# Altium PCB BLE_ADS_ver02.PcbDoc (part 2 of 2)
Units mm, origin at the board's own origin, x right, y up, seen from the top; angles counter-clockwise.
Board outline 74.47 x 53.97 mm, 4 copper layers (Top Layer, GND, PWR, Bottom Layer), stack 0.778 mm thick; 104 components, 72 nets, 369 pads, 122 vias.
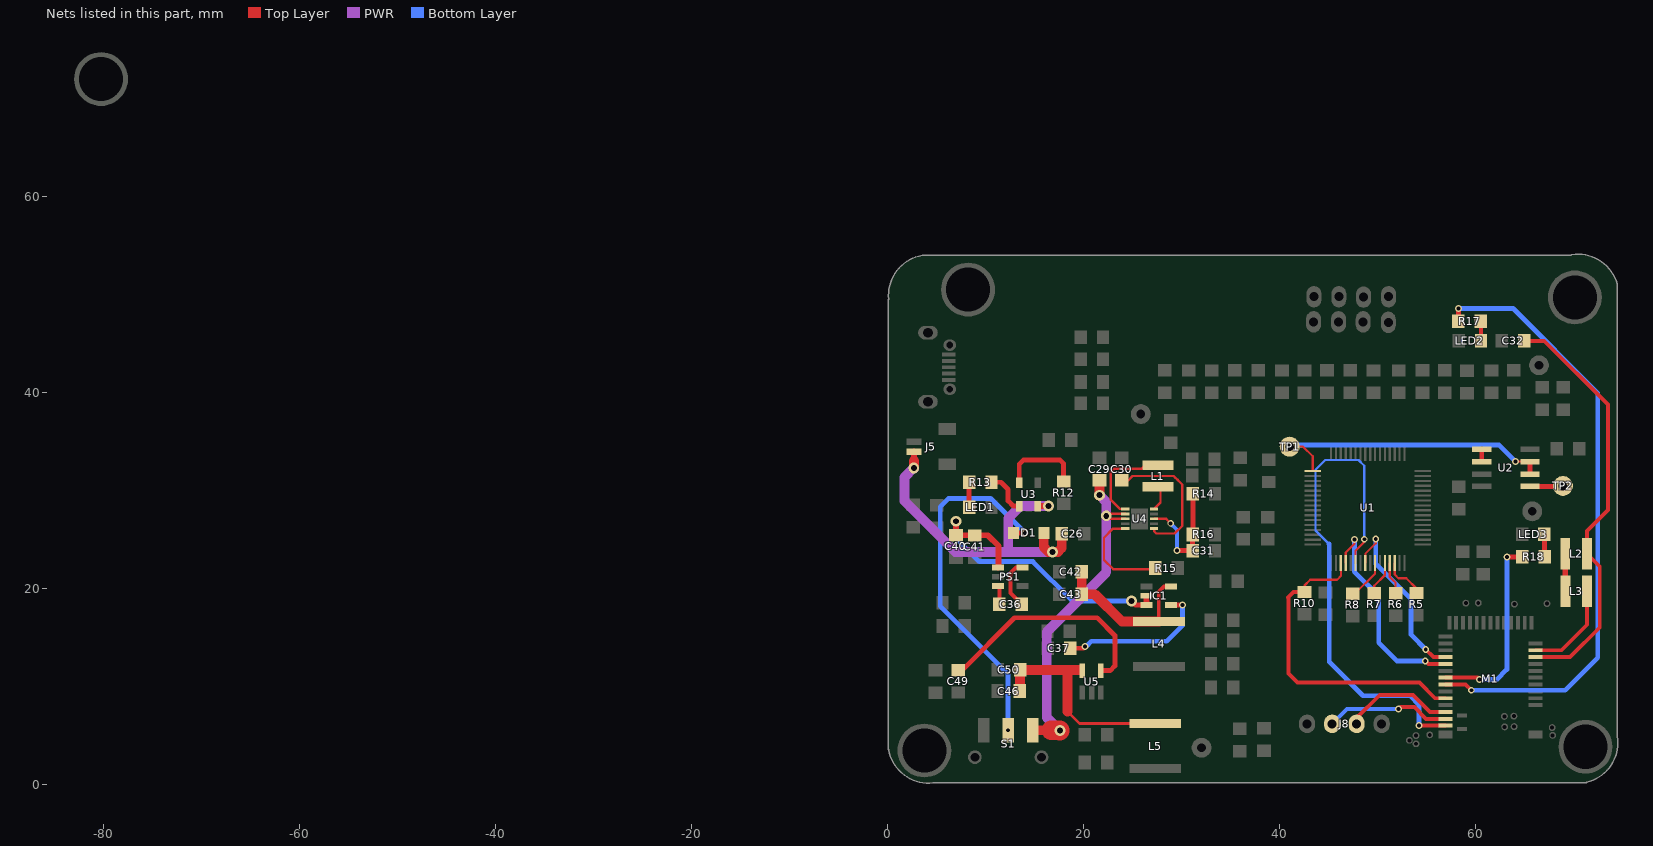
[diagram p4: the nets of this part, all layers, seen from the top]

## Via types
v1: diameter 1.1, hole 0.6, Top Layer to Bottom Layer, 97 vias
v2: diameter 0.7, hole 0.4, Top Layer to Bottom Layer, 25 vias

## Nets (pads, with @x,y where several pads share a name; then routed paths per layer and width w, separated by ;. In a path a pad name is that pad's centre, name@x,y a point inside that pad or via, vN(x,y) a via of type N, cw(c..) or ccw(c..) an arc to the next point about the centre after c; other vN are vias at no path point) (continued)
NetC26_2: C26.2 D1.2 J5.1 U3.3 | length 36.7
  Top Layer w0.6: 2.718,33.045 J5.1@2.718,33.985 ; U3.3@15.377,28.416 16.605,28.416 v1@16.599,28.423 ; v1(16.459,28.423) v1@16.599,28.423 ; v1@16.612,28.423 v1@16.599,28.423
  Top Layer w1: v1(2.718,32.309) 2.718,33.045 ; D1.2@15.977,25.679 15.977,24.231 16.459,23.749 v1(16.866,23.749) 17.424,23.749 17.805,24.13 C26.2@17.805,25.603
  PWR w1: v1(2.718,32.309) 2.692,32.309 1.753,31.369 1.753,28.956 6.96,23.749 v1(16.866,23.749) ; 12.344,24.257 12.344,27.153 13.618,28.426 16.455,28.426 v1(16.459,28.423)
NetC30_2: C30.2 U4.6 | length 14.4
  Top Layer w0.25: C30.2@23.927,31.064 24.613,31.064 25.044,31.496 29.231,31.496 29.406,31.321 29.411,31.321 29.66,31.072 29.66,31.067 30.109,30.618 30.109,30.57 30.106,30.567 30.106,26.402 29.333,25.629 27.457,25.629 27.231,25.855 U4.6@27.231,26.062
NetC31_2: C31.2 R14.1 R16.2 U4.8 | length 12.4
  Top Layer w0.25: U4.8@27.231,27.127 28.473,27.127 v2(28.931,26.67)
  Top Layer w0.5: v2(29.591,23.901) 29.616,23.876 C31.2@31.166,23.876 R16.2@31.166,25.527 31.224,25.585 31.224,29.635 R14.1@31.166,29.693
  Bottom Layer w0.4: v2(28.931,26.67) 29.591,26.01 v2(29.591,23.901)
NetC32_2: C32.2 L2.2 M1.9 | length 43.2
  Top Layer w0.4: C32.2@65.024,45.288 67.056,45.288 73.558,38.786 73.558,28.042 71.407,25.89 L2.2@71.407,23.546 71.425,23.546 72.72,22.25 72.72,16.027 69.707,13.014 M1.9@66.17,13.014
NetC36_1: C36.1 PS1.5 | length 5.1
  Top Layer w0.4: C36.1@13.741,18.415 12.598,19.558 12.598,21.615 13.142,22.159 PS1.5@13.798,22.159
NetC36_2: C36.2 PS1.3 | length 1.9
  Top Layer w0.4: PS1.3@11.298,20.259 11.455,20.101 C36.2@11.455,18.415
NetC37_1: C37.1 IC1.4 | length 15.7
  Top Layer w0.5: C37.1@18.669,13.919 20.015,13.919 v2(20.193,14.097) ; IC1.4@28.961,18.329 30.114,18.329 v2(30.124,18.339)
  Bottom Layer w0.5: v2(20.193,14.097) 20.301,14.097 20.834,14.63 28.524,14.63 30.124,16.231 v2(30.124,18.339)
NetC40_2: C40.2 C41.2 IC1.2 IC1.3 PS1.1 | length 33.6
  Top Layer w0.5: v1@24.714,18.745 v1(24.917,18.745) 25.334,18.329 IC1.3@26.461,18.329
  Top Layer w0.6: v1(7.01,26.873) C40.2@7.01,25.451 10.262,25.451 11.348,24.364 11.348,22.21 PS1.1@11.298,22.159 ; IC1.3@26.461,18.329 IC1.2@26.461,19.279
  Bottom Layer w0.5: v1(7.01,26.873) 7.01,25.146 9.398,22.758 14.859,22.758 18.872,18.745 v1(24.917,18.745)
NetC42_2: C42.2 C43.2 IC1.5 L4.1 | length 15.8
  Top Layer w0.4: L4.1@27.737,16.651 27.716,16.671 27.716,19.71 28.235,20.229 IC1.5@28.961,20.229
  Top Layer w1: C42.2@19.863,21.717 C43.2@19.863,19.431 21.184,19.431 23.964,16.651 L4.1@27.737,16.651
NetC46_2: C46.2 C50.2 L5.1 U5.5 | length 22
  Top Layer w0.3: 18.39,7.468 19.62,6.237 L5.1@27.356,6.237
  Top Layer w1: C46.2@13.538,9.55 13.538,11.709 18.567,11.709 ; 18.39,7.468 18.39,11.532 18.567,11.709 ; 19.609,11.709 18.567,11.709
NetC49_2: C49.2 U5.4 | length 23.7
  Top Layer w0.5: C49.2@7.264,11.684 7.645,11.684 12.991,17.029 21.426,17.029 23.241,15.215 23.241,12.116 22.758,11.633 U5.4@21.803,11.633
NetD1_1: D1.1 S1.2 | length 37.4
  Top Layer w0.5: D1.1@12.877,25.679 v2(14.072,25.679) v2@14.122,25.629
  Bottom Layer w0.5: v2(12.344,5.547) 12.344,11.278 5.41,18.212 5.41,28.346 6.274,29.21 10.541,29.21 v2(14.072,25.679)
NetL1_1: L1.1 U4.1 | length 10.3
  Top Layer w0.25: U4.1@24.281,28.127 23.765,28.127 22.803,29.089 22.803,31.875 23.186,32.258 25.984,32.258 26.568,32.842 27.668,32.842 L1.1@27.915,32.596
NetL1_2: L1.2 U4.10 | length 2.6
  Top Layer w0.25: U4.10@27.231,28.127 27.889,28.786 27.889,30.371 L1.2@27.915,30.396
NetL2_1: L2.1 L3.2 | length 3.8
  Top Layer w0.6: L3.2@69.207,19.761 L2.1@69.207,23.546
NetL3_1: L3.1 M1.10 | length 9.8
  Top Layer w0.4: M1.10@66.17,13.714 68.832,13.714 71.433,16.315 L3.1@71.433,19.736
NetLED1_2: LED1.2 R13.1 | length 2.5
  Top Layer w0.5: LED1.2@8.357,28.321 R13.1@8.357,30.861
NetLED2_1: LED2.1 R17.2 | length 2
  Top Layer w0.4: R17.2@60.579,47.295 60.604,47.269 LED2.1@60.604,45.314
NetLED3_1: LED3.1 R18.2 | length 2.3
  Top Layer w0.5: LED3.1@67.081,25.552 67.081,23.266 R18.2@67.107,23.241
NetM1_31: M1.31 R18.1 | length 19.8
  Top Layer w0.4: M1.31@56.97,10.914 60.256,10.914 v2(60.452,10.719)
  Top Layer w0.5: v2(63.246,23.241) R18.1@64.821,23.241
  Bottom Layer w0.5: v2(60.452,10.719) 62.205,10.719 63.246,11.76 v2(63.246,23.241)
NetM1_32: M1.32 R17.1 | length 63.3
  Top Layer w0.4: M1.32@56.97,10.214 59.026,10.214 v2(59.614,9.627)
  Top Layer w0.5: R17.1@58.293,47.295 v2(58.293,48.59)
  Bottom Layer w0.5: v2(58.293,48.59) 63.881,48.59 72.517,39.954 72.517,12.954 69.19,9.627 v2(59.614,9.627)
NetR5_1: R5.1 U1.46 | length 4.4
  Top Layer w0.22: 51.797,21.429 U1.46@51.797,22.625 ; 51.84,21.387 52.17,21.057 52.984,21.057 54.026,20.015 R5.1@54.026,19.558
NetR6_1: R6.1 U1.45 | length 3.3
  Top Layer w0.22: 51.297,21.189 U1.45@51.297,22.625 ; 51.317,21.169 51.622,20.864 51.627,20.864 51.892,20.599 R6.1@51.892,19.533
NetR7_1: R7.1 U1.44 | length 3.5
  Top Layer w0.22: R7.1@49.708,19.533 49.708,20.295 50.797,21.384 U1.44@50.797,22.625
NetR8_1: R8.1 U1.42 | length 4.2
  Top Layer w0.22: R8.1@47.523,19.482 47.727,19.482 49.797,21.553 U1.42@49.797,22.625
NetR12_1: R12.1 U3.5 | length 8.6
  Top Layer w0.5: U3.5@13.477,30.816 13.477,32.705 13.919,33.147 17.628,33.147 18.009,32.766 R12.1@18.009,30.937
NetR13_2: R13.2 U3.1 | length 4.5
  Top Layer w0.5: R13.2@10.643,30.861 11.608,30.861 12.344,30.124 12.344,28.956 12.884,28.416 U3.1@13.477,28.416
NetR15_1: R15.1 U4.5 | length 10.5
  Top Layer w0.25: U4.5@24.281,26.127 23.054,26.127 22.123,25.197 22.123,22.936 23.063,21.996 27.254,21.996 R15.1@27.356,22.098
NetTP1_1: TP1.1 U1.17 U2.6 U2.7 | length 30.8
  Top Layer w0.22: TP1.1@41.072,34.493 42.443,34.493 43.428,33.509 U1.17@43.428,31.995 ; v2(64.135,32.969) U2.7@65.608,32.969
  Top Layer w0.5: U2.6@65.608,31.699 U2.7@65.608,32.969
  Bottom Layer w0.5: TP1.1@41.072,34.493 41.224,34.646 62.459,34.646 v2(64.135,32.969)
NetU2_1: U2.1 U2.2 | length 1.3
  Top Layer w0.5: U2.2@60.681,32.969 U2.1@60.681,34.239
PWDN: M1.34 R10.1 U1.35 | length 32.9
  Top Layer w0.22: R10.1@42.596,19.66 42.596,20.32 43.18,20.904 45.916,20.904 46.297,21.285 U1.35@46.297,22.625
  Top Layer w0.4: R10.1@42.596,19.66 41.453,19.66 40.894,19.101 40.945,19.05 40.945,11.328 41.859,10.414 54.305,10.414 55.905,8.814 M1.34@56.97,8.814
REF_IN: TP2.1 U2.5 | length 3.4
  Top Layer w0.5: U2.5@65.608,30.429 68.91,30.429 TP2.1@68.961,30.48
RESET: M1.29 U1.36 | length 22.1
  Top Layer w0.22: U1.36@46.797,22.625 46.797,23.683 47.676,24.562 v2(47.676,25.019) 47.65,25.019 v2@47.6,25.07
  Top Layer w0.4: v2(54.915,12.598) 54.961,12.598 55.245,12.314 M1.29@56.97,12.314
  Bottom Layer w0.5: v2(47.676,25.019) 47.676,21.742 50.165,19.253 50.165,14.478 52.045,12.598 v2(54.915,12.598)
SCK: M1.28 U1.40 | length 18.6
  Top Layer w0.22: U1.40@48.797,22.625 48.797,23.575 49.86,24.638 v2(49.86,25.07)
  Top Layer w0.4: v2(54.966,13.792) 55.743,13.014 M1.28@56.97,13.014
  Bottom Layer w0.5: v2(49.86,25.07) 49.86,22.53 53.467,18.923 53.467,15.291 v2(54.966,13.792)
START: M1.38 U1.38 | length 52
  Top Layer w0.22: U1.38@47.797,22.625 47.797,23.871 48.692,24.765 v2(48.692,25.044) v2@48.616,25.044
  Top Layer w0.4: v2(54.28,6.02) 54.285,6.014 M1.38@56.97,6.014
  Bottom Layer w0.22: 45.085,24.562 43.713,25.933 43.713,32.131 44.704,33.122 48.108,33.122 48.692,32.537 v2(48.692,25.044)
  Bottom Layer w0.5: 45.085,24.562 45.11,24.536 45.11,12.522 48.565,9.068 53.391,9.068 54.28,8.179 v2(54.28,6.02)
SWD_CLK: J8.3 M1.36 | length 11.3
  Top Layer w0.4: J8.3@47.904,6.198 47.904,6.782 50.267,9.144 53.67,9.144 55.4,7.414 M1.36@56.97,7.414
SWDIO: J8.2 M1.37 | length 12.8
  Top Layer w0.4: v2(52.197,7.722) 52.375,7.899 53.823,7.899 55.008,6.714 M1.37@56.97,6.714
  Bottom Layer w0.4: J8.2@45.415,6.198 46.939,7.722 v2(52.197,7.722)
VCC: C29.2 S1.3 U4.2 U4.3 | length 35.6
  Top Layer w0.25: v1(22.352,27.432) 22.547,27.627 U4.2@24.281,27.627 ; v1@22.479,27.127 U4.3@24.281,27.127
  Top Layer w1: S1.3@14.844,5.547 16.729,5.547 ; v1@21.641,29.515 v1(21.666,29.54) C29.2@21.666,31.064
  Top Layer w2: 16.729,5.547 16.739,5.537 17.602,5.537 v1(17.628,5.512)
  PWR w1: v1(17.628,5.512) 16.281,6.858 16.281,15.596 22.352,21.666 v1(22.352,27.432) 22.352,28.854 v1(21.666,29.54)
pads on no net: H1.2 H1.3 J5.0 M1.2 M1.3 M1.4 M1.5 M1.6 M1.7 M1.8 M1.13 M1.14 M1.15 M1.16 M1.17 M1.18 M1.19 M1.20 M1.21 M1.22 M1.23 M1.33 M1.35 M1.40 M1.41 S1.1 S1.4 S1.5 U1.1 U1.2 U1.3 U1.4 U1.5 U1.6 U1.7 U1.8 U1.18 U1.27 U1.29 U1.37 U1.64
copper on no net: | length 1.2
  Top Layer w0.4: 55.804,8.114 56.97,8.114

## Polygon pours and split planes (outlines as drawn)
NetC24_2 on PWR "Top Layer-No Net 1" (solid, remove dead copper, pour order 0): 5.258,43.18 8.814,46.736 8.814,46.787 12.116,43.485 12.116,34.798 12.116,34.29 13.03,33.376 13.437,32.969 16.104,32.969 16.18,32.969 16.942,32.207 16.942,30.759 16.84,30.658 16.51,30.328 15.977,30.328 11.76,30.328 11.151,30.937 10.363,30.937 9.83,30.404 9.703,30.277 9.703,29.718 11.405,28.016 11.405,27.991 11.405,26.06 10.643,25.298 9.373,25.298 9.144,25.527 5.867,28.804 3.251,28.804 3.124,28.931 2.667,29.388 2.667,30.048 2.667,30.912 2.616,30.963 3.581,31.928 3.988,31.928 6.096,31.928 7.569,33.401 8.128,33.96 8.128,40.081 8.128,40.564 5.385,43.307
NetC26_2 on PWR "Top Layer-No Net 1" (solid, remove dead copper, pour order 2): 3.912,32.588 2.489,31.166 2.489,29.235 6.96,24.765 7.214,24.765 11.1,24.765 11.582,25.248 11.608,25.273 11.608,27.076 11.608,27.813 13.005,29.21 13.31,29.515 15.519,29.515 16.967,29.515 17.247,29.235 17.551,28.931 17.551,27.94 17.551,27.737 17.196,27.381 16.764,26.949 15.926,26.949 15.519,26.949 15.088,26.518 14.656,26.086 14.656,25.222 14.732,25.222 15.062,24.892 15.113,24.841 16.916,24.841 17.272,24.841 17.678,24.435 17.78,24.333 17.78,23.647 17.78,23.393 17.577,23.19 17.45,23.063 17.094,23.063 17.45,23.063 17.094,22.708 17.069,22.708 6.579,22.708 6.502,22.784 0.737,28.6 1.016,28.423 1.016,28.321 0.737,28.6 1.041,28.296 0.737,28.6 0.737,31.496 0.737,31.928 1.829,33.02 2.54,33.731 2.591,33.731 3.734,32.588 3.861,32.588
VCC on PWR "Top Layer-No Net 1" (solid, remove dead copper, pour order 4): 19.914,29.794 19.99,29.794 21.539,31.344 23.825,29.058 23.825,28.804 23.825,21.463 17.704,15.037 17.704,12.725 17.704,7.696 18.999,6.401 19.355,6.045 19.355,5.105 18.364,4.115 18.313,4.064 17.374,4.064 16.866,4.064 15.342,5.588 14.326,6.604 14.326,13.437 14.326,16.129 14.707,16.51 20.879,22.682 20.879,27.407 20.879,27.991 19.533,29.337 19.939,29.743 19.939,29.794
+2.5V on PWR "Top Layer-No Net 1" (solid, remove dead copper, pour order 6): 30.124,0.889 35.992,0.889 39.116,4.013 39.218,4.115 39.218,9.525 39.218,9.601 39.929,10.312 39.929,15.85 41.3,17.221 41.377,17.297 41.377,25.298 41.377,26.264 43.612,28.499 46.838,28.499 46.939,28.499 47.701,29.261 47.701,30.48 47.727,30.48 47.981,30.734 48.108,30.861 50.622,30.861 51.257,30.861 51.435,30.683 51.511,30.607 51.511,28.778 51.511,27.864 51.283,27.635 51.283,26.949 51.537,26.695 51.587,26.645 53.594,26.645 56.032,26.645 57.531,28.143 57.861,28.473 61.747,28.473 69.164,35.89 69.164,36.881 68.783,37.262 68.021,37.262 60.63,29.87 57.302,29.87 57.226,29.87 55.728,28.372 55.575,28.219 53.264,28.219 53.264,28.346 52.934,28.677 52.934,31.572 52.705,31.801 52.07,32.436 46.355,32.436 45.999,32.436 45.212,31.648 45.034,31.471 45.034,30.658 44.602,30.226 44.171,30.226 42.52,30.226 39.014,26.721 39.014,18.593 38.608,18.186 36.271,15.85 36.271,13.716 36.271,11.582 35.738,11.049 35.585,10.897 35.585,6.452 35.585,5.207 34.061,3.683 30.15,3.683 30.023,3.556 30.023,1.067
DVDD on PWR "Top Layer-No Net 1" (solid, remove dead copper, pour order 8): 41.453,4.47 41.453,14.554 50.648,23.749 51.333,24.435 55.524,24.435 55.575,24.435 57.607,26.467 58.547,26.467 59.36,25.654 59.284,25.578 59.284,23.012 59.004,23.012 58.242,22.25 57.607,21.615 55.753,21.615 55.423,21.285 55.423,20.193 55.423,20.066 58.496,16.993 58.674,16.815 68.097,16.815 71.018,19.736 71.018,38.887 59.512,50.394 29.337,50.394 28.296,50.394 22.352,44.45 22.2,44.298 22.2,42.342 22.708,41.834 26.619,41.834 35.535,32.918 35.535,31.75 35.535,26.619 35.306,26.391 33.63,24.714 33.63,24.359 33.63,21.742 33.147,21.26 32.004,20.117 30.251,20.117 29.921,20.117 29.058,20.98 27.28,22.758 27.28,29.235 28.499,30.455 28.499,33.096 28.499,33.198 24.105,37.592 23.495,38.202 20.803,38.202 19.329,36.728 19.329,35.001 19.329,34.493 19.304,34.468 19.329,34.493 19.304,34.493 19.304,33.172 19.761,32.715 20.041,32.436 20.041,26.543 20.041,22.708 20.015,22.682 17.221,19.888 11.887,19.888 11.278,19.888 9.322,17.932 9.169,17.78 6.528,17.78 6.375,17.78 4.902,16.307 5.131,16.078 5.131,14.834 6.858,13.106 6.858,12.979 6.858,11.328 9.322,8.865 12.852,5.334 13.005,5.334 15.542,2.797 15.744,2.797 22.38,2.797 22.479,2.896 22.682,2.896 23.622,3.835 23.622,5.359 23.419,5.563 23.063,5.918 21.514,5.918 20.32,5.918 19.863,6.375 19.253,6.985 19.253,7.391 19.253,8.509 19.431,8.687 20.015,9.271 20.701,9.271 24.181,9.271 25.095,8.357 26.822,6.629 26.822,5.283 26.822,2.159 26.467,1.803 25.375,0.711 25.705,0.914 25.502,0.711 12.37,0.711 3.327,9.754 3.327,10.973 2.362,11.938 2.362,13.741 2.362,18.898 2.184,19.075 2.362,19.075 4.166,20.879 5.385,22.098 9.474,22.098 16.789,22.098 17.069,22.377 17.831,23.139 17.831,24.79 17.831,31.394 17.78,31.445 14.986,34.239 14.986,34.417 14.986,37.871 15.672,38.557 18.263,41.148 18.263,46.888 24.74,53.365 61.239,53.365 61.824,53.365 73.152,42.037 73.965,41.224 73.965,18.39 73.965,17.602 70.206,13.843 70.028,13.665 58.42,13.665 58.344,13.665 52.781,19.228 50.698,19.228 50.343,18.872 46.05,14.58 46.05,14.453 46.05,4.572 46.152,4.47 41.554,4.47 41.504,4.521
-2.5V on PWR "Top Layer-No Net 1" (solid, remove dead copper, pour order 10): 18.44,14.605 21.971,18.136 22.25,18.136 30.861,18.136 35.204,22.479 36.043,23.317 36.043,42.062 33.985,44.12 33.096,44.12 27.407,44.229 27.407,44.247 26.238,43.078 24.206,43.078 23.597,43.866 23.266,44.292 23.266,44.602 26.086,47.422 26.746,48.082 35.052,48.082 36.347,48.082 38.71,45.72 39.675,44.755 39.675,41.935 40.64,40.97 41.148,40.97 50.444,40.97 56.921,34.493 58.623,34.493 59.868,35.738 59.868,41.224 60.198,41.554 63.348,44.704 64.033,44.704 67.615,44.704 70.841,41.478 71.044,41.275 71.044,34.163 70.688,34.163 66.269,29.743 63.271,26.746 62.713,26.746 61.925,25.959 61.925,24.663 61.925,21.387 61.214,20.676 60.706,20.168 57.175,20.168 56.515,20.168 55.982,20.701 55.982,22.276 56.236,22.53 57.302,23.597 58.903,23.597 58.903,25.908 59.157,26.162 58.826,26.492 57.353,26.492 57.252,26.492 55.931,25.171 51.181,25.171 50.622,25.73 49.911,25.73 49.911,27.838 49.657,28.092 49.479,28.27 48.006,28.27 46.736,27 46.736,26.949 46.406,26.619 44.425,26.619 44.044,27 44.044,28.092 46.812,30.861 47.523,30.861 50.978,30.861 51.181,30.658 52.883,28.956 52.883,28.55 52.883,28.067 53.873,27.076 54.534,27.737 55.982,27.737 57.48,27.737 58.496,28.753 58.903,28.346 60.681,28.346 60.833,28.346 68.428,35.941 69.063,36.576 69.063,38.659 69.063,38.76 67.132,40.691 65.354,40.691 64.77,40.107 63.627,38.964 63.627,35.56 63.627,34.214 60.147,30.734 60.071,30.658 54.915,30.658 48.882,36.817 48.793,36.779 41.021,36.779 40.792,36.551 39.675,35.433 39.675,34.95 39.675,23.591 39.014,22.93 33.68,17.596 33.68,13.284 33.68,10.973 31.572,8.865 28.778,8.865 28.448,9.195 27.864,9.779 27.864,13.284 27.203,13.945 25.578,13.945 20.599,13.945 19.177,15.367
GND_PWR on Top Layer "Top Layer-No Net 1" (solid, remove dead copper, pour order 12): 0.457,46.914 9.627,46.914 9.627,33.503 9.677,33.452 20.574,33.452 20.625,33.401 20.726,33.503 20.726,33.579 20.726,35.814 34.442,35.814 34.468,35.789 34.442,35.763 34.442,0.711 34.417,0.686 3.404,0.686 2.997,0.686 cw(c2.997,3.226) 0.457,3.226 0.457,46.888
AGND on Top Layer "Top Layer-No Net 1" (solid, remove dead copper, pour order 14): 0.356,47.396 10.185,47.396 10.16,33.909 20.244,33.858 20.244,36.22 20.269,36.347 51.486,36.373 51.511,26.391 61.824,26.391 61.925,22.022 73.939,22.022 73.995,51.437 74.143,51.079 ccw(c70.485,49.783) 71.78,53.442 71.78,53.492 ccw(c71.806,53.467) 71.78,53.442 36.398,53.569 3.353,53.569 3.353,53.492 ccw(c3.312,53.653) 3.454,53.569 ccw(c3.539,53.426) 3.378,53.467 3.378,53.492 0.857,50.971 ccw(c1.637,50.191) 0.533,50.19 0.533,47.422
DGND on Top Layer "Top Layer-No Net 1" (solid, remove dead copper, pour order 16): 54.788,0.711 34.9,0.711 34.874,0.737 34.874,35.763 51.003,35.763 51.029,35.738 51.029,25.832 51.079,25.883 61.417,25.883 61.417,21.539 61.366,21.488 61.392,21.514 73.914,21.514 73.914,2.616 72.644,1.346 72.034,0.737 71.171,0.737 68.326,0.737 68.326,4.648 68.275,4.699 62.103,4.699 62.052,4.75 62.052,7.823 62.078,7.849 57.683,7.849 57.658,7.874 57.658,4.75 57.683,4.724 57.633,4.674 54.788,4.674 54.788,0.737 54.762,0.711
DGND on Bottom Layer "Top Layer-No Net 1" (solid, remove dead copper, pour order 24): 34.976,0.686 34.976,35.789 51.029,35.789 51.029,25.883 61.392,25.883 61.366,25.883 61.366,21.539 61.366,21.514 74.041,21.514 74.092,21.514 74.092,4.14 74.092,3.124 cw(c71.552,3.124) 71.552,0.584 70.917,0.584 68.402,0.584 cw(c68.402,0.635) 68.351,0.635 cw(c68.351,0.66) 68.326,0.66 68.326,4.851 ccw(c68.275,4.851) 68.275,4.902 62.306,4.902 62.306,7.925 ccw(c62.255,7.925) 62.255,7.976 57.455,8.001 57.404,4.902 54.61,4.928 54.559,0.737 34.976,0.787
AGND on Bottom Layer "Top Layer-No Net 1" (solid, remove dead copper, pour order 20): 0.559,47.473 cw(c0.62,47.411) 0.62,47.498 10.16,47.498 10.16,33.97 ccw(c10.247,33.97) 10.185,33.909 20.157,33.909 cw(c20.157,33.822) 20.218,33.884 20.218,36.297 20.244,36.297 51.537,36.297 51.537,36.246 51.537,26.416 56.007,26.416 61.9,26.416 61.9,22.022 61.951,22.022 74.016,22.022 74.016,22.047 74.016,50.978 73.99,50.978 ccw(c72.212,50.978) 73.469,52.235 73,52.705 72.804,52.901 ccw(c71.008,51.105) 71.008,53.645 3.937,53.645 3.795,53.645 ccw(c3.795,51.105) 1.999,52.901 1.422,52.324 1.354,52.255 ccw(c3.15,50.459) 0.61,50.459 0.61,47.498
GND_PWR on Bottom Layer "Top Layer-No Net 1" (solid, remove dead copper, pour order 18): 0.559,46.888 9.525,46.888 9.627,46.888 9.627,33.426 20.701,33.426 20.726,33.452 20.726,35.814 20.752,35.839 34.392,35.839 34.392,0.686 4.039,0.686 3.821,0.686 cw(c3.821,3.226) 2.025,1.43 1.143,2.311 cw(c2.431,3.599) 0.61,3.599 0.61,5.283 0.61,46.863
AGND on GND (split plane): 73.997,50.996 73.996,51 73.995,51.002
DGND on GND (split plane): 51.056,26.162 51.064,26.097 51.09,26.036 51.13,25.984 51.182,25.944 51.243,25.918 51.308,25.91 61.394,25.91 61.394,21.793 61.402,21.728 61.427,21.667 61.467,21.615 61.52,21.575 61.581,21.55 61.646,21.541 74.011,21.541 74.011,4.914 74.019,4.835 74.018,4.835 74.02,4.825 74.021,4.815 74.023,4.808 74.027,4.784 74.055,4.526 74.064,4.284 74.062,4.267 74.064,4.251 74.055,4.008 74.027,3.751 73.981,3.496 73.917,3.245 73.835,2.999 73.736,2.759 73.62,2.528 73.488,2.305 73.34,2.092 73.178,1.89 73.001,1.7 72.811,1.524 72.61,1.361 72.397,1.213 72.174,1.081 71.942,0.965 71.703,0.866 71.457,0.784 71.276,0.738 71.276,0.737 71.199,0.713 71.155,0.69 68.424,0.69 68.35,0.765 68.35,4.623 68.341,4.688 68.316,4.749 68.276,4.801 68.223,4.841 68.163,4.866 68.097,4.875 62.355,4.875 62.355,5.029 62.347,5.094 62.33,5.135 62.33,7.798 62.321,7.863 62.296,7.924 62.256,7.976 62.204,8.016 62.143,8.041 62.078,8.05 57.683,8.05 57.618,8.041 57.557,8.016 57.505,7.976 57.465,7.924 57.44,7.863 57.431,7.798 57.431,4.951 54.813,4.951 54.748,4.943 54.687,4.917 54.635,4.877 54.595,4.825 54.57,4.764 54.561,4.699 54.561,0.69 34.923,0.69 34.923,17.272 34.923,32.944 34.923,35.816 51.056,35.816
AGND on GND (split plane): 70.769,53.608 71.027,53.58 71.282,53.534 71.533,53.47 71.779,53.388 72.018,53.289 72.25,53.173 72.473,53.041 72.686,52.893 72.888,52.731 73.077,52.554 73.254,52.364 73.416,52.163 73.564,51.95 73.696,51.727 73.812,51.495 73.912,51.256 73.991,51.016 73.981,51.016 74.011,50.945 74.011,22.045 61.898,22.045 61.898,26.137 61.889,26.202 61.864,26.263 61.824,26.315 61.799,26.34 61.746,26.38 61.686,26.406 61.62,26.414 51.56,26.414 51.56,36.068 51.552,36.133 51.526,36.194 51.486,36.246 51.434,36.286 51.373,36.312 51.308,36.32 20.498,36.32 20.433,36.312 20.372,36.286 20.319,36.246 20.279,36.194 20.254,36.133 20.246,36.068 20.246,33.907 10.184,33.907 10.184,47.168 10.175,47.233 10.15,47.294 10.11,47.346 10.057,47.386 9.997,47.411 9.931,47.42 0.614,47.42 0.614,49.329 0.62,49.34 0.649,49.436 0.659,49.535 0.654,49.585 0.656,49.585 0.646,49.677 0.637,49.936 0.646,50.195 0.674,50.453 0.72,50.708 0.784,50.959 0.866,51.205 0.965,51.444 1.081,51.676 1.213,51.899 1.361,52.112 1.524,52.314 1.7,52.503 1.89,52.68 2.092,52.842 2.305,52.99 2.528,53.122 2.759,53.238 2.999,53.338 3.245,53.419 3.496,53.483 3.676,53.516 3.676,53.517 3.683,53.518 3.683,53.509 3.744,53.534 3.759,53.539 69.792,53.539 69.891,53.549 69.925,53.559 69.934,53.561 69.934,53.559 69.96,53.569 69.947,53.565 69.96,53.569 69.987,53.578 69.991,53.58 69.994,53.58 70.251,53.608 70.51,53.617
GND_PWR on GND (split plane): 9.679,33.655 9.688,33.59 9.713,33.529 9.753,33.477 9.805,33.437 9.866,33.411 9.931,33.403 20.498,33.403 20.563,33.411 20.624,33.437 20.676,33.477 20.716,33.529 20.741,33.59 20.75,33.655 20.75,35.816 34.419,35.816 34.419,32.944 34.419,17.272 34.419,0.69 4.675,0.69 4.619,0.685 4.618,0.687 4.475,0.672 4.216,0.663 3.957,0.672 3.7,0.7 3.445,0.746 3.194,0.81 2.948,0.891 2.708,0.991 2.477,1.107 2.254,1.239 2.041,1.387 1.839,1.549 1.65,1.726 1.473,1.915 1.31,2.117 1.163,2.33 1.03,2.553 0.914,2.785 0.815,3.024 0.733,3.27 0.669,3.521 0.647,3.646 0.646,3.645 0.645,3.654 0.616,3.75 0.614,3.754 0.614,46.916 9.679,46.916

## Other copper
Top Layer:
  region net DGND: 62.306,7.798 64.694,7.798 64.694,5.207 62.382,5.207 62.357,5.232 62.357,7.722 62.306,7.772
  region net DGND: 52.883,5.309 52.89,5.316 54.803,5.316 54.788,5.3 54.788,3.327 52.832,3.327 52.807,3.353 52.807,5.258 52.857,5.309
GND (plane layer: these items are gaps in the copper):
  pour cut-out: 54.813,4.699 54.813,0.686 68.301,0.686 68.326,0.711 68.326,4.699
  pour cut-out: 62.103,4.623 62.103,7.823 57.658,7.823 57.683,7.798 57.683,4.623
  lines w0.5: 0,47.168 9.931,47.168 9.931,33.655 20.498,33.655 20.498,36.068 34.671,36.068 ; 23.368,36.068 34.671,36.068 ; 34.671,0.127 34.671,17.272 34.671,32.944 34.671,36.068 ; 54.813,0.69 54.813,4.699 57.683,4.699 57.683,7.798 62.078,7.798 62.078,5.055 62.103,5.029 62.103,4.623 68.097,4.623 68.097,0.66 68.301,0.457 ; 74.32,21.793 61.646,21.793 61.646,26.137 61.62,26.162 51.308,26.162 51.308,36.068 34.671,36.068

## Silkscreen, mask and mechanical layers (free items; w line width, h text height)
Top Overlay:
  lines w0.2: 27.534,43.79 29.007,43.79 28.753,43.536 28.702,43.536 28.956,43.79 28.677,44.069 ; 28.854,49.886 30.328,49.886 30.074,49.632 30.023,49.632 30.277,49.886 29.997,50.165 ; 40.996,43.713 44.882,43.713 44.882,45.618 ; 46.584,43.586 48.057,43.586 47.803,43.332 47.752,43.332 48.006,43.586 47.727,43.866 ; 53.137,50.14 54.61,50.14 54.356,49.886 54.305,49.886 54.559,50.14 54.28,50.419
  lines w0.3: 0.254,3.658 0.254,49.428 ; 0.279,3.658 ccw(c4.216,4.293) 4.851,0.356 ; 0.339,49.251 cw(c4.267,49.936) 3.632,53.873 ; 3.683,53.899 70.714,53.899 ; 4.623,0.33 71.272,0.33 ; 31.242,34.849 32.893,34.849 ; 32.131,36.246 33.985,36.246 ; 69.875,53.924 cw(c70.51,49.987) 74.363,51.016 ; 71.069,0.33 ccw(c70.434,4.267) 74.371,4.902 ; 74.371,4.14 74.371,51.016
  text "*" at 53.137,50.14 h1
  text "+" at 41.072,44.018 h1
  text "1" at 42.342,43.942 h1
  text "*" at 46.914,43.663 h1
  text "SWDIO" at 43.18,8.077 h1
  text "CLK" at 46.711,2.692 h1
  text "GND" at 49.378,2.642 h1
  text "VDD" at 41.554,2.565 h1
Top Paste:
  region: 27.457,37.871 27.508,37.922 30.124,37.922 30.124,34.138 30.074,34.087 27.534,34.087 27.457,34.163
  region: 32.588,19.279 32.537,19.329 32.537,21.946 36.322,21.946 36.373,21.895 36.373,19.355 36.297,19.279
Top Solder:
  region: 27.508,37.897 27.559,37.948 30.175,37.948 30.175,34.163 30.124,34.112 27.584,34.112 27.508,34.188
  region: 32.588,19.329 32.537,19.38 32.537,21.996 36.322,21.996 36.373,21.946 36.373,19.406 36.297,19.329
Mechanical 15:
  text "AGND" at 15.113,50.419 h2
  text "GND_PWR" at 3.251,10.566 h2 r90
  text "DGND" at 42.57,1.346 h2
Drill Drawing:
  circle w0.254: c4.131,72.259 r0.847
  lines w0.254: 3.284,64.215 3.707,64.215 3.707,63.792 4.554,63.792 4.554,64.215 4.977,64.215 4.977,65.062 4.554,65.062 4.554,65.485 3.707,65.485 3.707,65.062 3.284,65.062 3.284,64.215 ; 3.284,68.449 4.131,67.602 4.977,68.449 4.131,69.295 3.284,68.449 ; 3.284,75.222 4.977,75.222 4.977,76.915 3.284,76.915 3.284,75.222 ; 3.284,79.032 3.284,79.455 3.707,79.879 3.284,80.302 3.284,80.725 3.707,80.725 4.131,80.302 4.554,80.725 4.977,80.725 4.977,80.302 4.554,79.879 4.977,79.455 4.977,79.032 4.554,79.032 4.131,79.455 3.707,79.032 3.284,79.032 ; 3.284,83.265 3.707,83.265 4.131,82.842 4.554,83.265 4.977,83.265 4.554,83.689 4.977,84.112 4.554,84.112 4.131,84.535 3.707,84.112 3.284,84.112 3.707,83.689 3.284,83.265 ; 3.284,88.345 4.977,88.345 4.131,86.652 3.284,88.345 ; 3.284,90.462 4.131,90.885 4.977,90.462 4.554,91.309 4.977,92.155 4.131,91.732 3.284,92.155 3.707,91.309 3.284,90.462
  lines w0.381: 1.765,62.649 279.665,62.649 ; 1.765,93.129 279.665,93.129 ; 15.758,58.839 15.758,96.939 ; 30.74,58.839 30.74,96.939 ; 59.687,58.839 59.687,96.939 ; 72.536,58.839 72.536,96.939 ; 91.175,58.839 91.175,96.939 ; 129.264,58.839 129.264,96.939 ; 144.246,58.839 144.246,96.939 ; 163.189,58.839 163.189,96.939 ; 189.089,58.839 189.089,96.939 ; 210.775,58.839 210.775,96.939 ; 244.649,58.839 244.649,96.939 ; 1.765,58.839 279.665,58.839 279.665,96.939 1.765,96.939 1.765,58.839
  text "Symbol" at 4.051,94.272 h1.83
  text "Count" at 16.901,94.272 h1.83
  text "Hole Size" at 31.883,94.272 h1.83
  text "Plated" at 60.83,94.272 h1.83
  text "Hole Type" at 73.679,94.272 h1.83
  text "Drill Layer Pair" at 92.318,94.272 h1.83
  text "Via/Pad" at 130.407,94.272 h1.83
  text "Pad Shape" at 145.389,94.272 h1.83
  text "Template" at 164.332,94.272 h1.83
  text "Description" at 190.232,94.272 h1.83
  text "Hole Tolerance (+)" at 211.918,94.272 h1.83
  text "Hole Tolerance (-)" at 245.792,94.272 h1.83
  text "2" at 16.901,90.462 h1.52
  text "0.700mm (27.56mil)" at 31.883,90.462 h1.52
  text "PTH" at 60.83,90.462 h1.52
  text "Round" at 73.679,90.462 h1.52
  text "Top Layer - Bottom Layer" at 92.318,90.462 h1.52
  text "Pad" at 130.407,90.462 h1.52
  text "Rounded" at 145.389,90.462 h1.52
  text "r115_130h70r100" at 164.332,90.462 h1.52
  text "2" at 16.901,86.652 h1.52
  text "0.900mm (35.43mil)" at 31.883,86.652 h1.52
  text "PTH" at 60.83,86.652 h1.52
  text "Round" at 73.679,86.652 h1.52
  text "Top Layer - Bottom Layer" at 92.318,86.652 h1.52
  text "Pad" at 130.407,86.652 h1.52
  text "Rounded" at 145.389,86.652 h1.52
  text "c140h90" at 164.332,86.652 h1.52
  text "2" at 16.901,82.842 h1.52
  text "1.000mm (39.37mil)" at 31.883,82.842 h1.52
  text "PTH" at 60.83,82.842 h1.52
  text "Round" at 73.679,82.842 h1.52
  text "Top Layer - Bottom Layer" at 92.318,82.842 h1.52
  text "Pad" at 130.407,82.842 h1.52
  text "Rounded" at 145.389,82.842 h1.52
  text "r140_200h100r100" at 164.332,82.842 h1.52
  text "5" at 16.901,79.032 h1.52
  text "4.500mm (177.17mil)" at 31.883,79.032 h1.52
  text "PTH" at 60.83,79.032 h1.52
  text "Round" at 73.679,79.032 h1.52
  text "Top Layer - Bottom Layer" at 92.318,79.032 h1.52
  text "Pad" at 130.407,79.032 h1.52
  text "Rounded" at 145.389,79.032 h1.52
  text "c550h450m560" at 164.332,79.032 h1.52
  text "6" at 16.901,75.222 h1.52
  text "0.889mm (35.00mil)" at 31.883,75.222 h1.52
  text "PTH" at 60.83,75.222 h1.52
  text "Round" at 73.679,75.222 h1.52
  text "Top Layer - Bottom Layer" at 92.318,75.222 h1.52
  text "Pad" at 130.407,75.222 h1.52
  text "Rounded" at 145.389,75.222 h1.52
  text "c203h89" at 164.332,75.222 h1.52
  text "12" at 16.901,71.412 h1.52
  text "0.914mm (36.00mil)" at 31.883,71.412 h1.52
  text "PTH" at 60.83,71.412 h1.52
  text "Round" at 73.679,71.412 h1.52
  text "Top Layer - Bottom Layer" at 92.318,71.412 h1.52
  text "Pad" at 130.407,71.412 h1.52
  text "Rounded" at 145.389,71.412 h1.52
  text "(Mixed)" at 164.332,71.412 h1.52
  text "39" at 16.901,67.602 h1.52
  text "0.400mm (15.75mil)" at 31.883,67.602 h1.52
  text "PTH" at 60.83,67.602 h1.52
  text "Round" at 73.679,67.602 h1.52
  text "Top Layer - Bottom Layer" at 92.318,67.602 h1.52
  text "(Mixed)" at 130.407,67.602 h1.52
  text "Rounded" at 145.389,67.602 h1.52
  text "(Mixed)" at 164.332,67.602 h1.52
  text "97" at 16.901,63.792 h1.52
  text "0.600mm (23.62mil)" at 31.883,63.792 h1.52
  text "PTH" at 60.83,63.792 h1.52
  text "Round" at 73.679,63.792 h1.52
  text "Top Layer - Bottom Layer" at 92.318,63.792 h1.52
  text "Via" at 130.407,63.792 h1.52
  text "Rounded" at 145.389,63.792 h1.52
  text "v110h60" at 164.332,63.792 h1.52
  text "165 Total" at 16.901,59.982 h1.52

## Dimensions
3.683,53.899 to 4.623,0.33 on Mechanical 16
0.254,3.658 to 74.371,4.14 on Mechanical 16

## Text inside footprints (layer, text, board x,y; h text height)
H1: Top Overlay "B-F" at 4.683,38.351 h0.9 r90
M1: Mechanical 2 "No ground pad" at 64.185,2.804 h0.45 r180; Mechanical 3 "Toplayer no ground pad" at 64.37,8.689 h0.3 r180
U1: Top Overlay "*" at 52.793,35.649 h1.27 r270; Mechanical 13 "*" at 52.412,33.287 h1.27 r270
U2: Top Overlay "*" at 60.109,34.671 h1.27; Mechanical 13 "*" at 61.214,33.49 h1.27
U4: Top Overlay "*" at 23.526,28.28 h1.27; Mechanical 13 "*" at 24.117,27.213 h1.27
U5: Top Overlay "*" at 19.472,8.826 h1.27 r90; Mechanical 13 "*" at 20.437,9.576 h1.27 r90